# Altium PCB PCB_prob_2024-08-19.pcbdoc
Units mil, origin at the board's own origin, x right, y up, seen from the top; angles counter-clockwise.
Board outline 12910 x 4910 mil, 2 copper layers (Top Layer, Bottom Layer); 57 components, 36 nets, 213 pads, 27 vias.
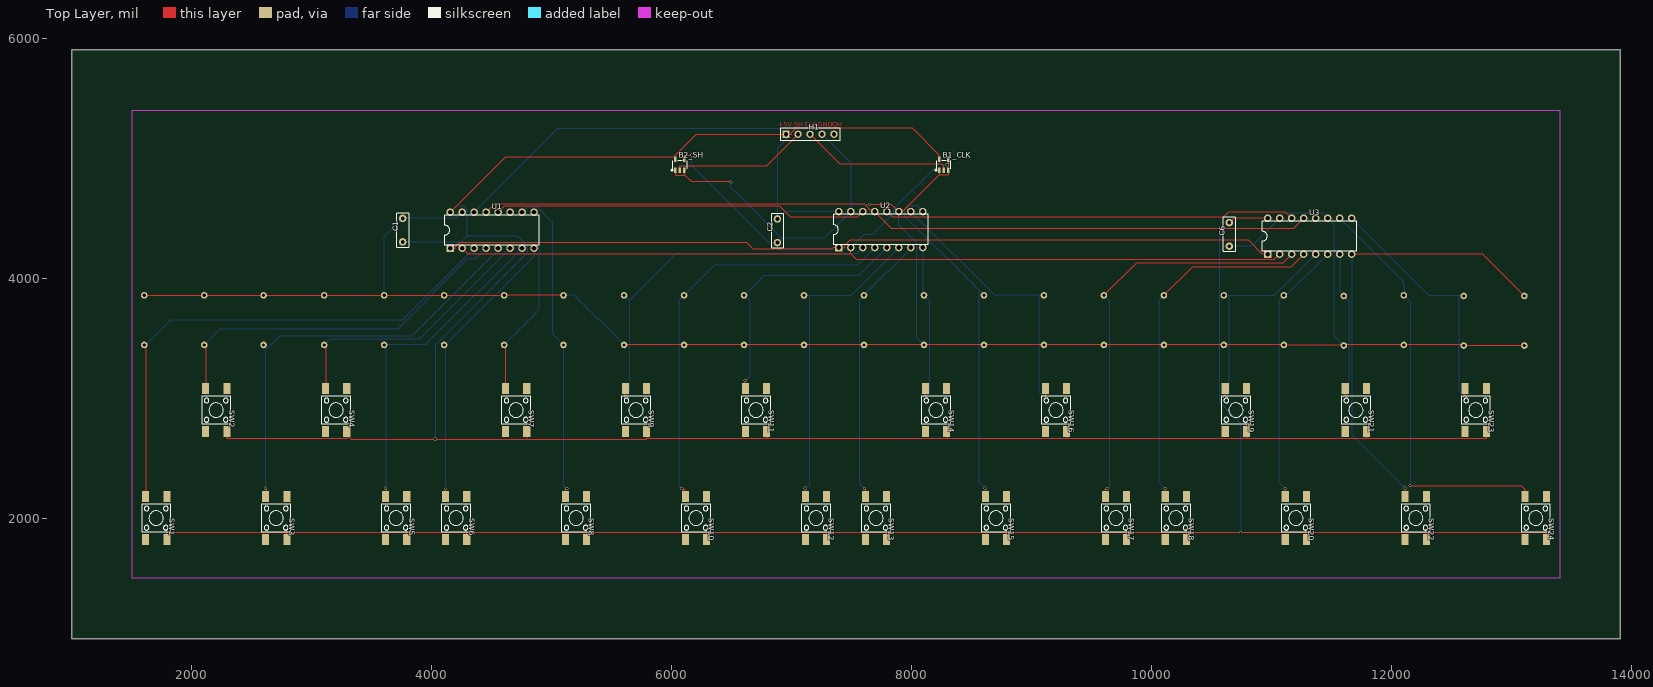
[diagram p0: Top Layer view]
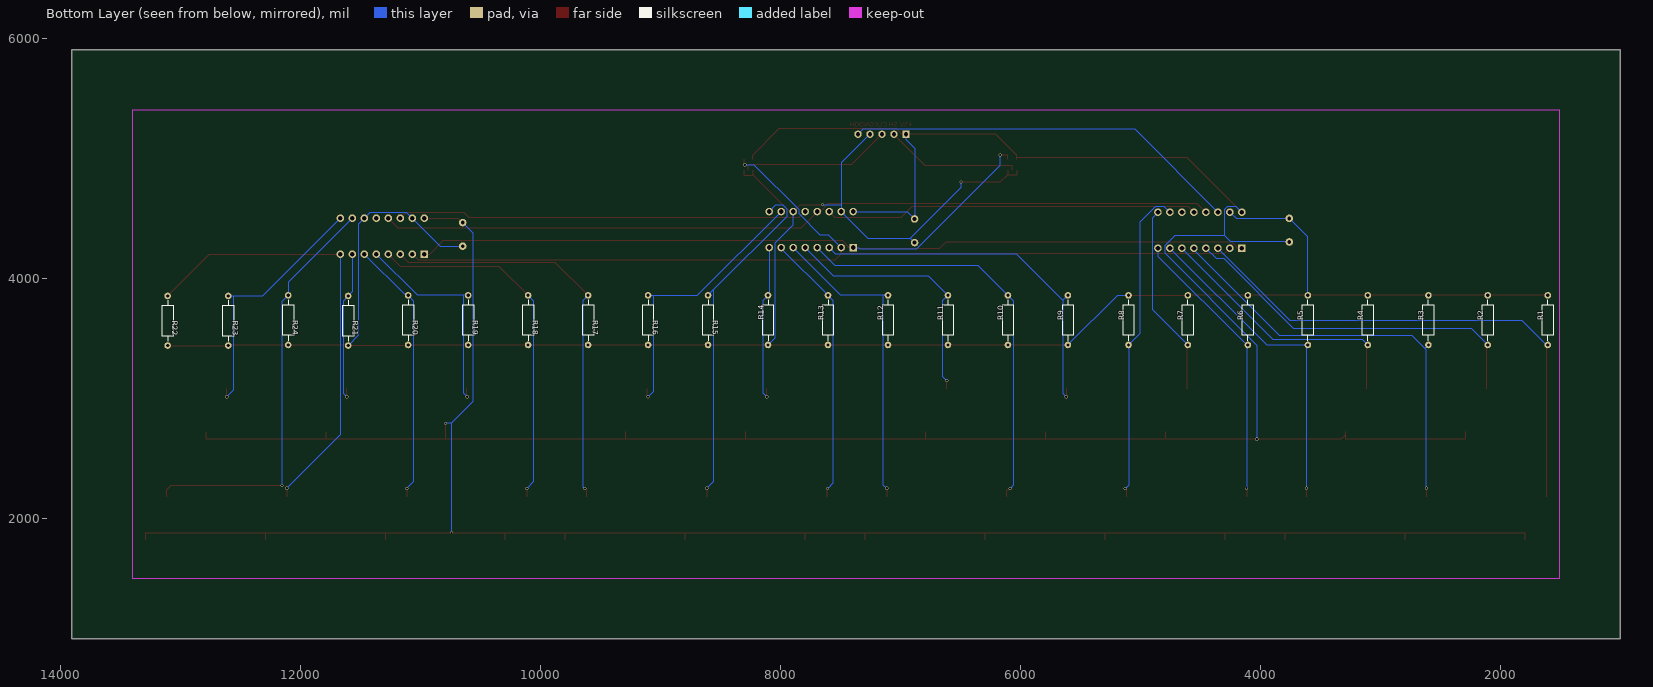
[diagram p1: Bottom Layer view, seen from below]

## Layer stack, top to bottom
Top Layer: signal copper (thickness not stored)
Dielectric: dielectric 12.6, FR-4, Dk 4.8
Bottom Layer: signal copper (thickness not stored)

## Board outline
13910,1000 1000,1000 1000,5910 13910,5910

## Components (designator, comment, footprint, x,y, rotation, side; value= is the part's Value field where it differs from the comment)
B1_CLK "SN74LVC1G125DBVR" SOT-23-5_L3.0-W1.7-P0.95-LS2.8-BL 8270,4950 r0 top
B2_SH "SN74LVC1G125DBVR" SOT-23-5_L3.0-W1.7-P0.95-LS2.8-BL 6070,4950 r0 top
C1 "100nF" CAP-TH_L7.2-W2.5-P5.00-D0.5 3760,4405 r90 top
C2 "100nF" CAP-TH_L7.2-W2.5-P5.00-D0.5 6883.33,4400 r90 top
C6 "100nF" CAP-TH_L7.2-W2.5-P5.00-D0.5 10650,4370 r90 top
H1 "HDR-F-2.54_1x5" HDR-F-2.54_1X5 7155,5205 r0 top
R1 "110kΩ" RES-TH_BD2.3-L6.5-P10.50-D0.5 1605,3655 r270 bottom
R2 "110kΩ" RES-TH_BD2.3-L6.5-P10.50-D0.5 2105,3655 r270 bottom
R3 "110kΩ" RES-TH_BD2.3-L6.5-P10.50-D0.5 2600,3655 r270 bottom
R4 "110kΩ" RES-TH_BD2.3-L6.5-P10.50-D0.5 3105,3655 r270 bottom
R5 "110kΩ" RES-TH_BD2.3-L6.5-P10.50-D0.5 3605,3655 r270 bottom
R6 "110kΩ" RES-TH_BD2.3-L6.5-P10.50-D0.5 4105,3655 r270 bottom
R7 "110kΩ" RES-TH_BD2.3-L6.5-P10.50-D0.5 4605,3655 r270 bottom
R8 "110kΩ" RES-TH_BD2.3-L6.5-P10.50-D0.5 5100,3655 r270 bottom
R9 "110kΩ" RES-TH_BD2.3-L6.5-P10.50-D0.5 5605,3655 r90 bottom
R10 "110kΩ" RES-TH_BD2.3-L6.5-P10.50-D0.5 6105,3655 r90 bottom
R11 "110kΩ" RES-TH_BD2.3-L6.5-P10.50-D0.5 6605,3655 r90 bottom
R12 "110kΩ" RES-TH_BD2.3-L6.5-P10.50-D0.5 7105,3655 r90 bottom
R13 "110kΩ" RES-TH_BD2.3-L6.5-P10.50-D0.5 7605,3655 r90 bottom
R14 "110kΩ" RES-TH_BD2.3-L6.5-P10.50-D0.5 8105,3655 r90 bottom
R15 "110kΩ" RES-TH_BD2.3-L6.5-P10.50-D0.5 8605,3655 r90 bottom
R16 "110kΩ" RES-TH_BD2.3-L6.5-P10.50-D0.5 9105,3655 r90 bottom
R17 "110kΩ" RES-TH_BD2.3-L6.5-P10.50-D0.5 9605,3655 r90 bottom
R18 "110kΩ" RES-TH_BD2.3-L6.5-P10.50-D0.5 10105,3655 r90 bottom
R19 "110kΩ" RES-TH_BD2.3-L6.5-P10.50-D0.5 10605,3655 r90 bottom
R20 "110kΩ" RES-TH_BD2.3-L6.5-P10.50-D0.5 11105,3655 r90 bottom
R21 "110kΩ" RES-TH_BD2.3-L6.5-P10.50-D0.5 11605,3650 r90 bottom
R22 "110kΩ" RES-TH_BD2.3-L6.5-P10.50-D0.5 13110,3650 r90 bottom
R23 "110kΩ" RES-TH_BD2.3-L6.5-P10.50-D0.5 12605,3650 r90 bottom
R24 "110kΩ" RES-TH_BD2.3-L6.5-P10.50-D0.5 12105,3655 r90 bottom
SW1 "SW" SW-SMD_4P-L6.0-W6.0-P4.50-LS9.0-2 1705,2005 r270 top
SW2 "SW" SW-SMD_4P-L6.0-W6.0-P4.50-LS9.0-2 2205,2905 r270 top
SW3 "SW" SW-SMD_4P-L6.0-W6.0-P4.50-LS9.0-2 2705,2005 r270 top
SW4 "SW" SW-SMD_4P-L6.0-W6.0-P4.50-LS9.0-2 3205,2905 r270 top
SW5 "SW" SW-SMD_4P-L6.0-W6.0-P4.50-LS9.0-2 3705,2005 r270 top
SW6 "SW" SW-SMD_4P-L6.0-W6.0-P4.50-LS9.0-2 4205,2005 r270 top
SW7 "SW" SW-SMD_4P-L6.0-W6.0-P4.50-LS9.0-2 4705,2905 r270 top
SW8 "SW" SW-SMD_4P-L6.0-W6.0-P4.50-LS9.0-2 5205,2005 r270 top
SW9 "SW" SW-SMD_4P-L6.0-W6.0-P4.50-LS9.0-2 5705,2905 r270 top
SW10 "SW" SW-SMD_4P-L6.0-W6.0-P4.50-LS9.0-2 6205,2005 r270 top
SW11 "SW" SW-SMD_4P-L6.0-W6.0-P4.50-LS9.0-2 6705,2905 r270 top
SW12 "SW" SW-SMD_4P-L6.0-W6.0-P4.50-LS9.0-2 7205,2005 r270 top
SW13 "SW" SW-SMD_4P-L6.0-W6.0-P4.50-LS9.0-2 7705,2005 r270 top
SW14 "SW" SW-SMD_4P-L6.0-W6.0-P4.50-LS9.0-2 8205,2905 r270 top
SW15 "SW" SW-SMD_4P-L6.0-W6.0-P4.50-LS9.0-2 8705,2005 r270 top
SW16 "SW" SW-SMD_4P-L6.0-W6.0-P4.50-LS9.0-2 9205,2905 r270 top
SW17 "SW" SW-SMD_4P-L6.0-W6.0-P4.50-LS9.0-2 9705,2005 r270 top
SW18 "SW" SW-SMD_4P-L6.0-W6.0-P4.50-LS9.0-2 10205,2005 r270 top
SW19 "SW" SW-SMD_4P-L6.0-W6.0-P4.50-LS9.0-2 10705,2905 r270 top
SW20 "SW" SW-SMD_4P-L6.0-W6.0-P4.50-LS9.0-2 11205,2005 r270 top
SW21 "SW" SW-SMD_4P-L6.0-W6.0-P4.50-LS9.0-2 11705,2905 r270 top
SW22 "SW" SW-SMD_4P-L6.0-W6.0-P4.50-LS9.0-2 12205,2005 r270 top
SW23 "SW" SW-SMD_4P-L6.0-W6.0-P4.50-LS9.0-2 12705,2905 r270 top
SW24 "SW" SW-SMD_4P-L6.0-W6.0-P4.50-LS9.0-2 13205,2005 r270 top
U1 "SN74HC165N" DIP-16_L19.8-W6.5-P2.54-LS7.6-BL 4505,4405 r0 top
U2 "SN74HC165N" DIP-16_L19.8-W6.5-P2.54-LS7.6-BL 7745,4410 r0 top
U3 "SN74HC165N" DIP-16_L19.8-W6.5-P2.54-LS7.6-BL 11320,4355 r0 top

## Footprints (in the part's own frame and the unit in brackets; to place one, negate y for a bottom-side part, rotate by r counter-clockwise, add the part's x,y. Pads: shape width x height; smd on the part's side, far side on the other; paste and mask are expansions set on the pad)
CAP-TH_L7.2-W2.5-P5.00-D0.5 [mm]
  round 1.6 hole 0.8 paste+0 mask+0.05: 1(-2.5,0) 2(2.5,0)
  silkscreen extent -3.6,-1.25 3.6,1.25
DIP-16_L19.8-W6.5-P2.54-LS7.6-BL [mm]
  rect 1.6x1.6 hole 1 paste+0 mask+0.051: 1(-8.89,-3.81)
  round 1.6 hole 1 paste+0 mask+0.051: 2(-6.35,-3.81) 3(-3.81,-3.81) 4(-1.27,-3.81) 5(1.27,-3.81) 6(3.81,-3.81) 7(6.35,-3.81) 8(8.89,-3.81) 9(8.89,3.81) 10(6.35,3.81) 11(3.81,3.81) 12(1.27,3.81) 13(-1.27,3.81) 14(-3.81,3.81) 15(-6.35,3.81) 16(-8.89,3.81)
  silkscreen extent -10,-3.2 10,3.2
HDR-F-2.54_1X5 [mil]
  rect 62x62 hole 35 paste+0 mask+2: 1(-200,0)
  round 62 hole 35 paste+0 mask+2: 2(-100,0) 3(0,0) 4(100,0) 5(200,0)
  silkscreen extent -250,-50 250,50
RES-TH_BD2.3-L6.5-P10.50-D0.5 [mm]
  round 1.4 hole 0.7 paste+0 mask+0.051: 1(5.25,0) 2(-5.25,0)
  silkscreen extent -4.32,-1.15 4.32,1.15
SOT-23-5_L3.0-W1.7-P0.95-LS2.8-BL [mm]
  rect 0.49x1.157 smd paste+0 mask+0.051: 1(-0.95,-1.154) 2(0,-1.154) 3(0.95,-1.154)
  rect 0.49x1.175 smd paste+0 mask+0.051: 4(0.95,1.154) 5(-0.95,1.154)
  silkscreen extent -1.8,-1.29 1.53,0.85
SW-SMD_4P-L6.0-W6.0-P4.50-LS9.0-2 [mm]
  rect 2.3x1.5 smd paste+0 mask+0.051: 1(-4.55,2.25) 2(4.55,2.25) 3(-4.55,-2.25) 4(4.55,-2.25)
  silkscreen extent -3,-3 3,3

## Via types
v1: diameter 27.56, hole 19.69, Top Layer to Bottom Layer, tented both sides, 27 vias

## Nets (pads, with @x,y where several pads share a name; then routed paths per layer and width w, separated by ;. In a path a pad name is that pad's centre, name@x,y a point inside that pad or via, vN(x,y) a via of type N, cw(c..) or ccw(c..) an arc to the next point about the centre after c; other vN are vias at no path point)
CLK: B1_CLK.2 H1.3 | length 1260.3
  Top Layer w10: H1.3 7406.52,4953.48 8256.77,4953.48 8270,4940.25 B1_CLK.2
CLK_OUT: B1_CLK.4 U1.2 U2.2 U3.2 | length 8086
  Top Layer w10: U1.2 4303.08,4206.92 7495,4206.92 ; U2.2 7495,4206.92 ; v1(8299.22,4949.83) 8307.4,4958.01 B1_CLK.4 ; U3.2 11022.56,4157.56 7544.36,4157.56 7495,4206.92
  Bottom Layer w10: U2.2 7603.94,4368.94 7673.48,4368.94 7850.56,4546.02 7850.56,4578.46 8221.93,4949.83 v1(8299.22,4949.83)
GND_PORT: B1_CLK.1 B1_CLK.3 B2_SH.1 B2_SH.3 C1.2 C2.1 C6.1 H1.4 R1.2 R2.2 R3.2 R4.2 R5.2 R6.2 R7.2 R8.2 R9.2 R10.2 R11.2 R12.2 R13.2 R14.2 R15.2 R16.2 R17.2 R18.2 R19.2 R20.2 R21.2 R22.2 R23.2 R24.2 U1.15 U2.11 U2.15 U3.11 U3.15 | length 19888.1
  Top Layer w10: R1.2 R2.2 R3.2 R4.2 R5.2 R6.2 R7.2 R8.2 ; R9.2 R10.2 R11.2 R12.2 R13.2 R14.2 R15.2 R16.2 R17.2 R18.2 R19.2 R20.2 11107.5,3445.81 R21.2@11605,3445.81 ; B2_SH.1 6032.6,4868.91 6037.45,4864.06 6102.55,4864.06 6107.4,4868.91 ; B2_SH.3 6107.4,4868.91 ; v1(6496.23,4806.91) 6169.4,4806.91 6107.4,4868.91 ; v1(7650.66,4618.73) 7836.27,4618.73 U2.11 7923.69,4560 8232.6,4868.91 ; B1_CLK.1 8232.6,4868.91 ; B1_CLK.3 8307.4,4868.91 8303.17,4864.68 8236.83,4864.68 8232.6,4868.91 ; R21.2 R21.2@11605,3445.81 ; R22.2 R23.2 12600,3448.31 R24.2 11607.5,3448.31 R21.2@11605,3445.81
  Bottom Layer w10: R5.2 3605,4348.43 C1.2 4203.43,4503.43 U1.15 ; R8.2 5191.62,3861.69 R9.2 ; v1(6496.23,4806.91) 6496.23,4762.02 6920,4338.25 ; C2.1 6920,4338.25 ; H1.4 7495,4965 7495,4618.73 ; v1(7650.66,4618.73) 7495,4618.73 ; U2.11 7895,4450.28 8045,4300.28 8045,3508.31 R14.2 ; C6.1 10836.58,4271.58 U3.15 11116.46,4551.46 11423.54,4551.46 U3.11 11520,4455.01 11520,3528.32 R21.2 ; 6920,4338.25 7273.25,4338.25 U2.15 7495,4618.73
QH: H1.5 U1.14 | length 3305.6
  Bottom Layer w10: U1.14 5048.94,5248.94 7311.06,5248.94 H1.5
QH#: U1.13 U2.13 U3.13 | length 6962.5
  Top Layer w10: U1.13 4525.42,4625.42 7606.21,4625.42 7671.63,4560 U2.13 7832.64,4422.36 11187.36,4422.36 U3.13
SH/LD#: B2_SH.2 H1.2 | length 1130.3
  Top Layer w10: B2_SH.2 6070,4940.25 6073.51,4943.76 6793.76,4943.76 H1.2
SH/LD#_OUT: B2_SH.4 U1.1 U2.1 U3.1 | length 8645.8
  Top Layer w10: U1.1 4199.38,4255 4199.38,4266.1 4236.63,4303.35 6625.32,4303.35 6676.77,4251.9 7342.51,4251.9 7350.61,4260 U2.1 7439.38,4260 7439.38,4271.1 7487.31,4319.03 10811.58,4319.03 10925.61,4205 U3.1 ; B2_SH.4 6107.4,5031.44 v1(6169.97,5031.44)
  Bottom Layer w10: v1(6169.97,5031.44) 6169.97,4944.83 6863.94,4250.86 7341.47,4250.86 7350.61,4260 U2.1
U1: R1.1 SW1.3 U1.3 | length 4353.1
  Top Layer w10: R1.1 1616.42,3436.89 SW1.3
  Bottom Layer w10: R1.1 1616.42,3448.31 1823.11,3655 3755,3655 U1.3
U1_11: U1.11
U1_12: U1.12 U2.14 | length 3118.7
  Top Layer w10: U1.12 4604.33,4604.33 6900.87,4604.33 6993.31,4511.89 7546.89,4511.89 U2.14
U2: R2.1 SW2.3 U1.4 | length 3053.1
  Top Layer w10: R2.1 2116.42,3436.89 SW2.3
  Bottom Layer w10: R2.1 2240.81,3584.12 3721.63,3584.12 4302.33,4164.82 4364.82,4164.82 U1.4
U2_12: U2.12 U3.14 | length 3432.1
  Top Layer w10: U2.12 7843.42,4511.58 10601.6,4511.58 10643.01,4552.99 11122.01,4552.99 U3.14
U3: R3.1 SW3.3 U1.5 | length 3561.7
  Top Layer w10: SW3.3 v1(2616.41,2252.88)
  Bottom Layer w10: R3.1 2629.13,3419.19 ; v1(2616.41,2252.88) 2616.41,3406.47 2629.13,3419.19 ; U1.5 4555,4241.15 3839.74,3525.89 2735.83,3525.89 2629.13,3419.19
U3_12: U3.12
U4: R4.1 SW4.3 U1.6 | length 2253
  Top Layer w10: R4.1 3116.41,3436.9 SW4.3
  Bottom Layer w10: R4.1 3152.44,3495.75 3895.75,3495.75 U1.6
U5: R5.1 SW5.3 U1.7 | length 2748.3
  Top Layer w10: SW5.3 v1(3616.42,2252.67)
  Bottom Layer w10: R5.1 R5.1@3616.42,3448.31 ; v1(3616.42,2252.67) R5.1@3616.42,3448.31 ; U1.7 3948.31,3448.31 R5.1@3616.42,3448.31
U6: R6.1 SW6.3 U1.8 | length 2388.2
  Top Layer w10: SW6.3 v1(4116.42,2252.28)
  Bottom Layer w10: R6.1 R6.1@4116.42,3448.31 ; v1(4116.42,2252.28) R6.1@4116.42,3448.31 ; U1.8 4855,4186.89 R6.1@4116.42,3448.31
U7: R7.1 SW7.3 U1.9 | length 1616
  Top Layer w10: R7.1 4616.42,3436.89 SW7.3
  Bottom Layer w10: R7.1 4899.43,3742.74 4899.43,4510.57 U1.9
U8: R8.1 SW8.3 U1.10 | length 2666.2
  Top Layer w10: SW8.3 5116.42,2242.3 5116.77,2242.3 v1(5126.03,2251.56)
  Bottom Layer w10: U1.10 4802.25,4602.25 4875.51,4602.25 5007.37,4470.39 5007.37,3540.94 R8.1 5100,2277.59 v1(5126.03,2251.56)
U9: R9.1 SW9.3 U2.3 | length 3073.9
  Top Layer w10: SW9.3 5616.42,3019.77 v1(5619.93,3016.26)
  Bottom Layer w10: R9.1 5647.5,3819.19 ; v1(5619.93,3016.26) 5647.5,3043.83 5647.5,3819.19 ; U2.3 7542.77,4207.77 6036.08,4207.77 5647.5,3819.19
U10: R10.1 SW10.3 U2.4 | length 3488
  Top Layer w10: v1(6085.17,2251.38) 6094.25,2242.3 6116.42,2242.3 SW10.3
  Bottom Layer w10: v1(6085.17,2251.38) 6059.5,2277.05 6059.5,3816.19 R10.1 6356.61,4113.3 7548.3,4113.3 U2.4
U11: R11.1 SW11.3 U2.5 | length 2166.7
  Top Layer w10: SW11.3 v1(6616.42,3151.57)
  Bottom Layer w10: v1(6616.42,3151.57) 6651.92,3187.07 6651.92,3814.77 R11.1 6768.12,4024.81 7559.81,4024.81 U2.5
U12: R12.1 SW12.3 U2.6 | length 2645.5
  Top Layer w10: SW12.3 v1(7116.42,2252.58)
  Bottom Layer w10: R12.1 7147.7,3861.69 ; v1(7116.42,2252.58) 7147.7,2283.86 7147.7,3861.69 ; U2.6 7496.69,3861.69 7147.7,3861.69
U13: R13.1 SW13.3 U2.7 | length 2275.7
  Top Layer w10: v1(7608.91,2251.23) 7616.42,2243.72 SW13.3
  Bottom Layer w10: v1(7608.91,2251.23) 7564.47,2295.67 7564.47,3821.16 R13.1 7995,4251.69 U2.7
U14: R14.1 SW14.3 U2.8 | length 1350.4
  Top Layer w10: v1(8114.55,3016.02) 8116.42,3017.89 SW14.3
  Bottom Layer w10: U2.8 8095,3871.69 R14.1 8150.11,3816.58 8150.11,3051.58 v1(8114.55,3016.02)
U15: R15.1 SW15.3 U2.9 | length 2920.8
  Top Layer w10: SW15.3 v1(8616.42,2252.59)
  Bottom Layer w10: U2.9 8044.13,4610.87 7977.06,4610.87 7945,4578.81 7945,4521.69 8559.97,3906.72 ; R15.1 8559.97,3906.72 ; v1(8616.42,2252.59) 8559.97,2309.04 8559.97,3906.72
U16: R16.1 SW16.3 U2.10 | length 2335.3
  Top Layer w10: v1(9105.44,3016.25) 9115.15,3025.96 9116.42,3025.96 SW16.3
  Bottom Layer w10: U2.10 8693.31,3861.69 9063.45,3861.69 ; R16.1 9063.45,3861.69 ; v1(9105.44,3016.25) 9063.45,3058.24 9063.45,3861.69
U17: R17.1 SW17.3 U3.3 | length 3419.1
  Top Layer w10: R17.1 9877.04,4133.73 11098.73,4133.73 U3.3 ; SW17.3 9616.42,2242.3 9622.24,2242.3 v1(9631.78,2251.84)
  Bottom Layer w10: R17.1 9648.03,3818.66 9648.03,2268.09 v1(9631.78,2251.84)
U18: R18.1 SW18.3 U3.4 | length 3025.5
  Top Layer w10: R18.1 10344.92,4101.61 11166.61,4101.61 U3.4 ; SW18.3 v1(10116.42,2251.45)
  Bottom Layer w10: R18.1 10061.59,3818.28 10061.59,2306.28 v1(10116.42,2251.45)
U19: R19.1 SW19.3 U3.5 | length 1835.9
  Top Layer w10: v1(10612.82,3016.41) 10616.42,3020.01 SW19.3
  Bottom Layer w10: R19.1 10647.01,3861.69 ; v1(10612.82,3016.41) 10647.01,3050.6 10647.01,3861.69 ; U3.5 11026.69,3861.69 10647.01,3861.69
U20: R20.1 SW20.3 U3.6 | length 2226.2
  Top Layer w10: SW20.3 v1(11116.42,2251.87)
  Bottom Layer w10: v1(11116.42,2251.87) 11060.69,2307.6 11060.69,3817.38 R20.1 11126.69,3861.69 U3.6
U21: R21.1 SW21.3 U3.7 | length 1301.8
  Top Layer w10: v1(11616.4,3016.15) SW21.3
  Bottom Layer w10: U3.7 11570,3891.69 R21.1 11647.5,3814.18 11647.5,3047.24 v1(11616.4,3016.15)
U22: R22.1 SW22.3 U3.8 | length 3790
  Top Layer w10: U3.8 12761.7,4205 R22.1 ; SW22.3 v1(12116.4,2252.68)
  Bottom Layer w10: U3.8 11670,2699.1 v1(12116.4,2252.68)
U23: R23.1 SW23.3 U3.9 | length 2135.1
  Top Layer w10: v1(12616.4,3015.98) SW23.3
  Bottom Layer w10: U3.9 12318.3,3856.69 12561.5,3856.69 ; R23.1 12561.5,3856.69 ; v1(12616.4,3015.98) 12561.5,3070.91 12561.5,3856.69
U24: R24.1 SW24.3 U3.10 | length 3503.7
  Top Layer w10: v1(12156.4,2276.53) 13082.2,2276.53 13116.4,2242.3 SW24.3
  Bottom Layer w10: U3.10 12105,3970 R24.1 12156.4,3810.31 v1(12156.4,2276.53)
VCC_PORT: B1_CLK.5 B2_SH.5 C1.1 C2.2 C6.2 H1.1 SW1.2 SW2.2 SW3.2 SW4.2 SW5.2 SW6.2 SW7.2 SW8.2 SW9.2 SW10.2 SW11.2 SW12.2 SW13.2 SW14.2 SW15.2 SW16.2 SW17.2 SW18.2 SW19.2 SW20.2 SW21.2 SW22.2 SW23.2 SW24.2 U1.16 U2.16 U3.16 | length 35791.1
  Top Layer w10: SW1.2 1793.58,1884.04 1793.63,1884.09 2793.58,1884.09 3793.58,1884.09 4293.53,1884.09 4293.58,1884.04 ; SW2.2 2293.58,2667.7 2293.63,2667.65 3293.53,2667.65 3293.58,2667.7 SW4.2@3293.58,2696.79 ; SW3.2 2793.58,1884.04 ; SW4.2 SW4.2@3293.58,2696.79 ; SW5.2 3793.58,1884.04 ; U1.16 4613.43,5013.43 B2_SH.5@6032.6,5013.43 ; SW6.2 4293.58,1884.04 ; SW7.2 4793.58,2667.7 ; SW8.2 5293.58,1884.04 5293.63,1884.09 ; SW9.2 5793.58,2667.7 ; B2_SH.5 B2_SH.5@6032.6,5013.43 ; SW10.2 6293.58,1884.04 ; 6793.58,2667.7 SW11.2 ; SW12.2 7293.58,1884.04 ; SW13.2 7793.58,1884.04 ; B1_CLK.5 8232.6,5031.44 8011.14,5252.9 7035.82,5252.9 6998.89,5215.97 6998.89,5205 H1.1 6206.16,5205 6032.6,5031.44 B2_SH.5@6032.6,5013.43 ; SW14.2 8293.58,2667.7 ; SW15.2 8793.58,1884.04 ; 9293.58,2667.7 SW16.2 ; SW17.2 9793.58,1884.04 ; SW18.2 10293.58,1884.04 ; C6.2 10686.57,4505 U3.16 ; v1(10793.58,2793.89) SW19.2 10793.58,2667.7 ; SW20.2 11293.58,1884.04 ; 11793.6,2667.7 SW21.2 ; SW22.2 12293.6,1884.04 ; SW23.2 12793.6,2667.7 12793.5,2667.65 11793.6,2667.65 10793.63,2667.65 10793.58,2667.7 ; SW24.2 13293.6,1884.04 13293.5,1884.09 12293.6,1884.09 11293.58,1884.09 v1(10743.85,1884.09) 10293.58,1884.09 9793.58,1884.09 8793.58,1884.09 7793.58,1884.09 7293.58,1884.09 6293.58,1884.09 5293.63,1884.09 ; SW4.2@3293.58,2696.79 3329.03,2661.34 v1(4029.87,2661.34) 4787.22,2661.34 4793.58,2667.7 ; 4293.58,1884.04 4293.63,1884.09 5293.63,1884.09 ; 4793.58,2667.7 4797.44,2663.84 5789.72,2663.84 5793.58,2667.7 ; 5793.58,2667.7 5793.63,2667.65 6793.58,2667.65 8293.53,2667.65 8293.58,2667.7 ; 8293.58,2667.7 8293.63,2667.65 9293.58,2667.65 10793.53,2667.65 10793.58,2667.7
  Bottom Layer w10: C1.1 4246.31,4306.58 4299.55,4359.82 ; v1(4029.87,2661.34) 4029.87,3447.49 4799.44,4217.06 4799.44,4274.31 4713.93,4359.82 4299.55,4359.82 ; U1.16 4204.53,4604.53 4274.42,4604.53 4299.55,4579.4 4299.55,4359.82 ; H1.1 6955,5161.11 6883.33,5089.44 C2.2 6944.9,4560 U2.16 ; C6.2 10564.5,4382.93 10564.5,2973.24 10743.85,2793.89 ; v1(10743.85,1884.09) 10743.85,2793.89 ; v1(10793.58,2793.89) 10743.85,2793.89
pads on no net: SW1.1 SW1.4 SW2.1 SW2.4 SW3.1 SW3.4 SW4.1 SW4.4 SW5.1 SW5.4 SW6.1 SW6.4 SW7.1 SW7.4 SW8.1 SW8.4 SW9.1 SW9.4 SW10.1 SW10.4 SW11.1 SW11.4 SW12.1 SW12.4 SW13.1 SW13.4 SW14.1 SW14.4 SW15.1 SW15.4 SW16.1 SW16.4 SW17.1 SW17.4 SW18.1 SW18.4 SW19.1 SW19.4 SW20.1 SW20.4 SW21.1 SW21.4 SW22.1 SW22.4 SW23.1 SW23.4 SW24.1 SW24.4

## Other copper
Top Layer:
  text "+5V" at 6890,5265.31 h39.37
  text "SH" at 7025,5265.31 h39.37
  text "CLK" at 7110,5265.31 h39.37
  text "GND" at 7220,5265.31 h39.37
  text "QH" at 7340,5265.31 h39.37